# Altium PCB AlarmShield.PcbDoc (part 2 of 2)
Units mil, origin at the board's own origin, x right, y up, seen from the top; angles counter-clockwise.
Board outline 3700 x 2700 mil, 2 copper layers (Top Layer, Bottom Layer), stack 61.811 mil thick; 100 components, 79 nets, 356 pads, 76 vias.
Unrouted connection lines stored in the file: 2.
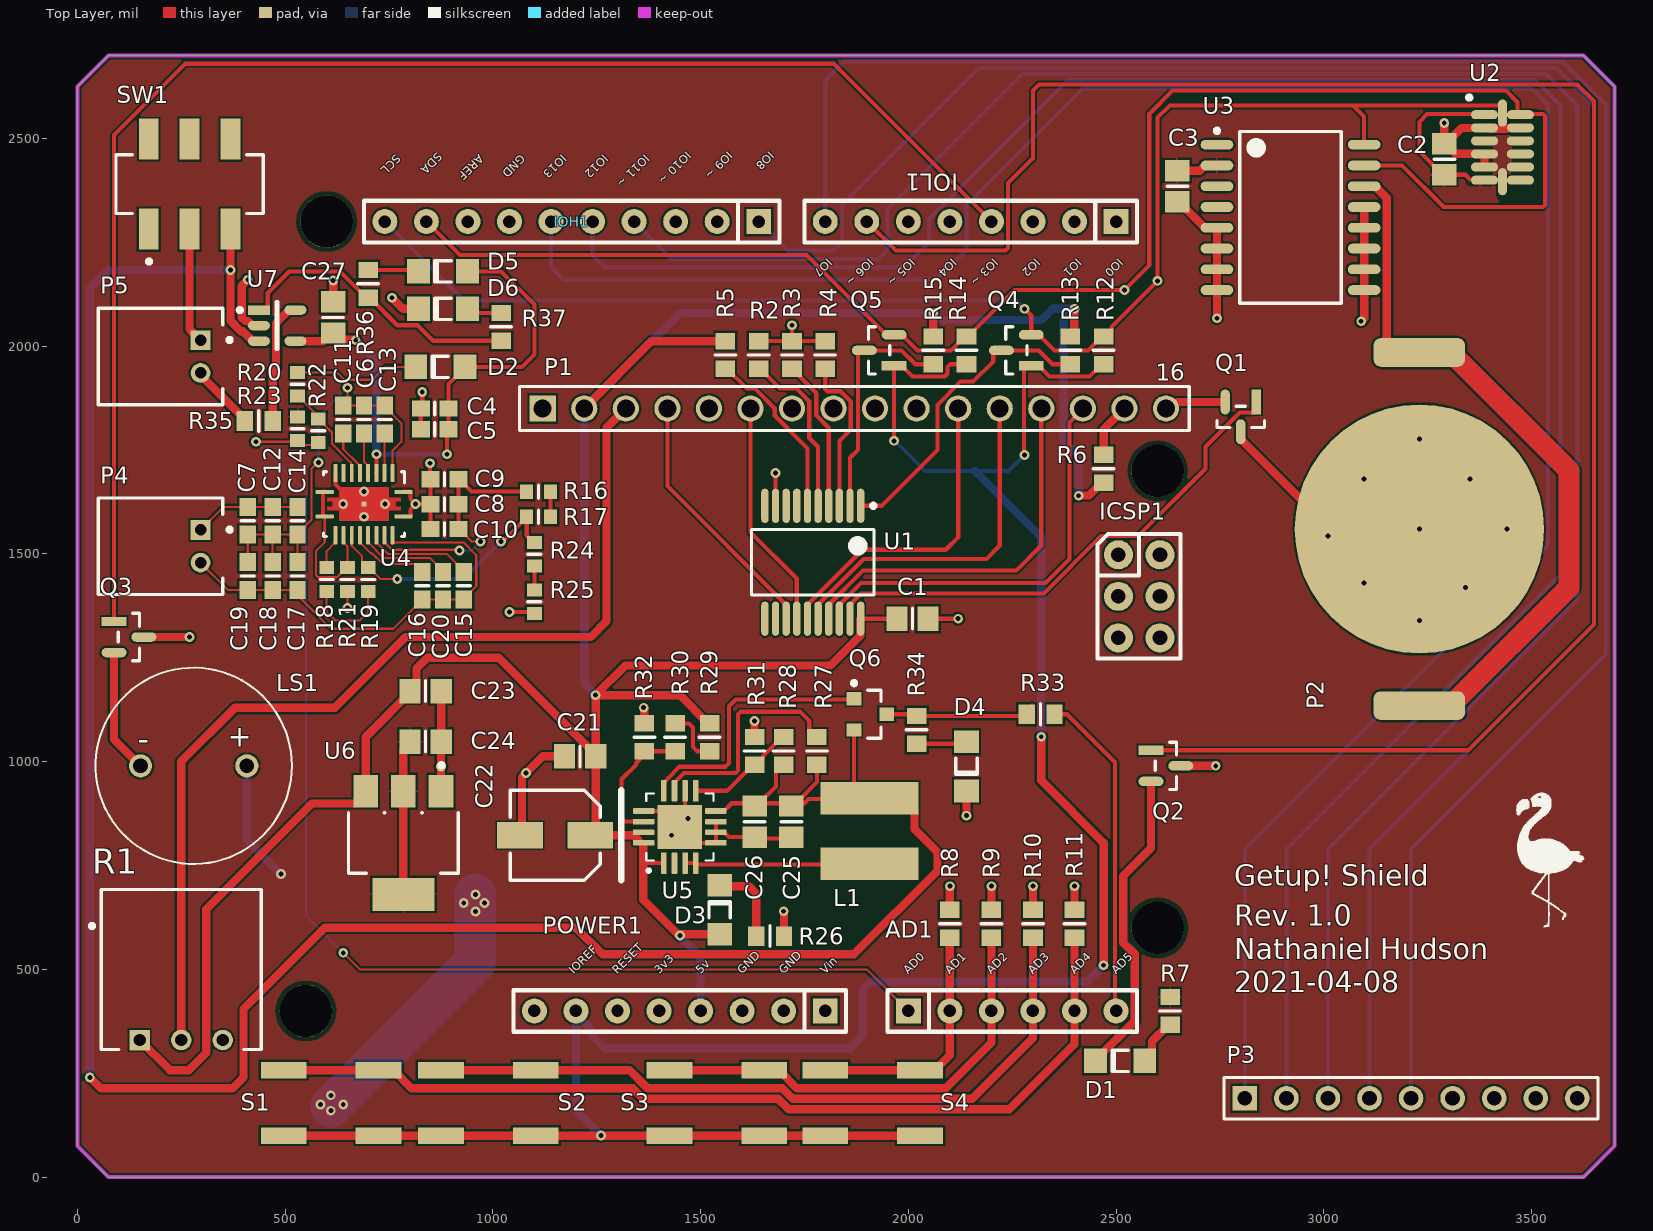
[diagram p0: Top Layer view]

## Via types
v1: diameter 23.62, hole 11.81, Top Layer to Bottom Layer, 76 vias

## Nets (pads, with @x,y where several pads share a name; then routed paths per layer and width w, separated by ;. In a path a pad name is that pad's centre, name@x,y a point inside that pad or via, vN(x,y) a via of type N, cw(c..) or ccw(c..) an arc to the next point about the centre after c; other vN are vias at no path point) (continued)
VBUS_SYS_5V0: (continued)
  Top Layer w20: R1.1 222.52,257.48 268.28,257.48 310.39,299.59 310.39,645.39 564.17,899.17 674.57,899.17 694.1,918.7 U6.3 694.1,1059.41 816.34,1181.65 816.34,1224.62 841.72,1250 1014.25,1250 C21.1@1247.4,1016.85 ; P1.VDD 1382.28,2012.28 R5.2 ; U5.16@1350.39,807.83 1350.39,811.2 1338.68,822.91 C22.1 1247.4,835.67 C21.1 C21.1@1247.4,1016.85 ; U5.16@1361.69,801.22 1361.69,761.22 1361.69,667.94 1447.82,581.81 v1(1450.38,581.81) ; v1@1450.61,580 1455.14,584.53 D3.2 ; R29.2 1517.76,1092.21 1449.97,1160 v1(1247.4,1160) ; U1.20 1884.02,1343.03 1884.02,1302.4 1813.16,1231.55 1318.95,1231.55 v1(1247.4,1160) ; R15.1 v1(2060,2080) ; R13.1 2399.31,2032.77 2399.31,2089.31 v1(2400,2090) ; v1(2410,1640) 2410.69,1640.69 2435.27,1640.69 2466.06,1671.48 R6.1 ; C21.1@1247.4,1016.85 v1(1247.4,1160)
  Bottom Layer w20: v1(1247.4,1160) 1247.4,1160.98 1220,1188.38 P1.VDD 1450,2080 v1(2060,2080) 2076.81,2063.19 2320.55,2063.19 2347.36,2090 v1(2400,2090) 2373.5,2063.5 2373.5,1773.37 2410,1736.87 v1(2410,1640) ; v1(1450.38,581.81) 1450.38,579.62 1500,530 POWER1.4
pads on no net: ICSP1.1 ICSP1.2 ICSP1.3 ICSP1.4 ICSP1.5 ICSP1.6 IOH1.7 IOH1.8 IOL1.1 IOL1.2 IOL1.3 IOL1.5 IOL1.6 P1.DB0 P1.DB1 P1.DB2 P1.DB3 POWER1.1 POWER1.5 POWER1.6 POWER1.8 SW1.1 SW1.4 SW1.5 SW1.6 U1.7 U1.8 U1.10 U1.11 U1.12 U2.3 U2.10 U2.11 U3.1 U3.3 U3.4 U4.8 U5.2

## Polygon pours and split planes (outlines as drawn)
GND on Bottom Layer "GND_POUR" (solid, remove dead copper, pour order 0): 0,75 0,2625 75,2700 3625,2700 3700,2625 3700,75 3625,0 75,0
VBUS_SYS_3V3 on Top Layer "VBUS_SYS_3V3_L01_P001" (solid, remove dead copper, pour order 1): 0,75 0,2625 75,2700 3625,2700 3700,2625 3700,75 3625,0 75,0

## Keep-outs
Keep-Out Layer:
  the board outline again, w10

## Silkscreen, mask and mechanical layers (free items; w line width, h text height)
Top Overlay:
  drawing of 764 lines, arcs and shapes, not listed
  text "IO10 ~" at 1465.75,2470.51 h20 r225
  text "IO9 ~" at 1565.75,2470.51 h20 r225
  text "IO8" at 1665.75,2470.51 h20 r225
  text "SDA" at 865.75,2468.44 h20 r225
  text "SCL" at 765.75,2463.44 h20 r225
  text "AREF" at 965.75,2463.44 h20 r225
  text "GND" at 1065.75,2463.44 h20 r225
  text "IO13" at 1165.75,2463.44 h20 r225
  text "IO12" at 1265.75,2463.44 h20 r225
  text "IO11 ~" at 1365.75,2463.44 h20 r225
  text "IO7" at 1805,2212.93 h20 r225
  text "IO6 ~" at 1905,2212.93 h20 r225
  text "IO5 ~" at 2005,2212.93 h20 r225
  text "IO4" at 2105,2212.93 h20 r225
  text "IO3 ~" at 2205,2212.93 h20 r225
  text "IO2" at 2305,2212.93 h20 r225
  text "IO1" at 2405,2212.93 h20 r225
  text "IO0" at 2505,2212.93 h20 r225
  text "Getup! Shield" at 2785,701.66 h50
  text "Rev. 1.0" at 2785,605 h50
  text "Nathaniel Hudson" at 2785,525 h50
  text "IOREF" at 1195,487.07 h20 r45
  text "RESET" at 1300,487.07 h20 r45
  text "3v3" at 1400,487.07 h20 r45
  text "5v" at 1500,487.07 h20 r45
  text "GND" at 1600,487.07 h20 r45
  text "GND" at 1700,487.07 h20 r45
  text "Vin" at 1800,487.07 h20 r45
  text "AD0" at 2000,487.07 h20 r45
  text "AD1" at 2100,487.07 h20 r45
  text "AD2" at 2200,487.07 h20 r45
  text "AD3" at 2300,487.07 h20 r45
  text "AD4" at 2400,487.07 h20 r45
  text "AD5" at 2500,487.07 h20 r45
  text "2021-04-08" at 2785,445 h50
Bottom Overlay:
  text "JLCJLCJLCJLC" at 3375,525 h50
Mechanical 1:
  circle w5: c600,2300 r62.99
  circle w5: c2600,600 r62.99
  circle w5: c550,400 r62.99
  circle w5: c2600,1700 r62.99

## Text inside footprints (layer, text, board x,y; h text height)
LS1: Top Overlay "-" at 173.54,1070 h56.06 r180; Top Overlay "+" at 420,1080 h50.12 r180
P1: Top Overlay "16" at 2595.2,1916.93 h40